# EAGLE board jncc3000 (EAGLE 6.5.0)
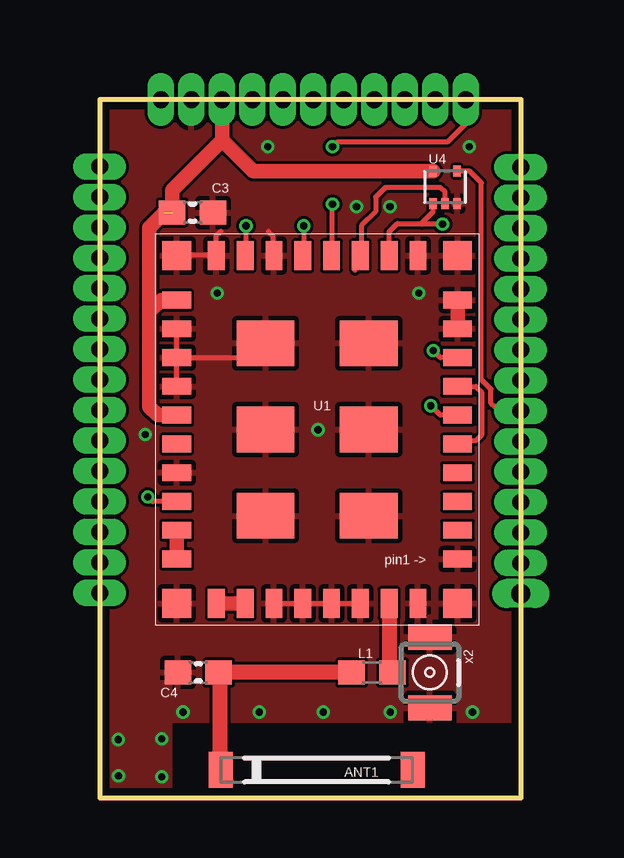
[diagram p0: board, top side]
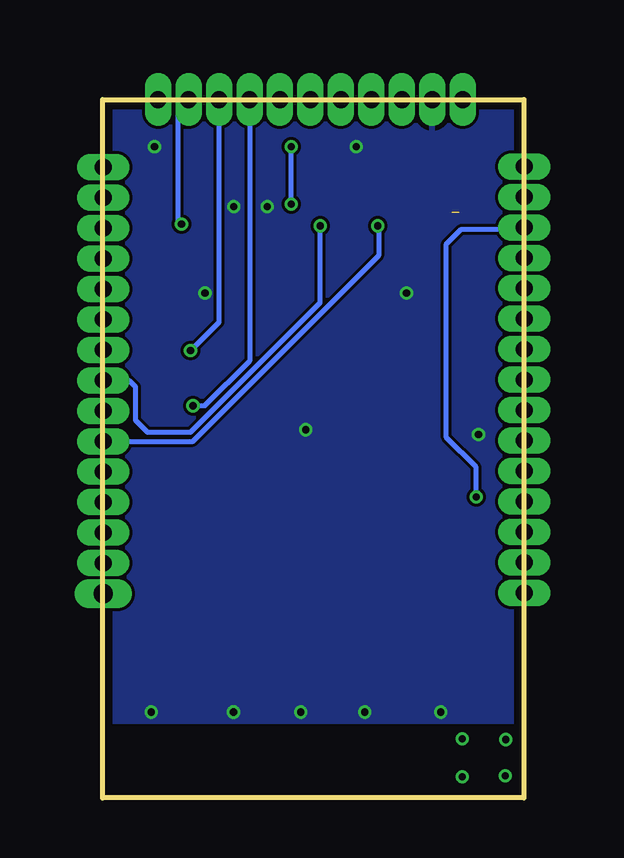
[diagram p1: board, bottom side, seen from below]

Size 17.55 x 29.12 mm. Coordinates in mm from the lower left corner, seen from the top.
Outline: 0,0 17.55,0 17.55,29.12 0,29.12 0,0
Copper layers (1*16): Top 0.035mm / dielectric 1.5mm / Bottom 0.035mm
Design rules "PCB-POOL HighSpec": minimum track width 0.125mm, minimum drill 0.2mm, track to track 0.125mm, track to pad 0.125mm, pad to pad 0.125mm, via to via 0.125mm, smd to smd 0.125mm, copper to edge 0.3mm, drill to drill 0.2mm, minimum pad ring 0.2mm, minimum via ring 0.125mm, stop-mask expansion 0.075mm, vias tented up to drill 0mil, thermal gap 0.2mm
Net classes: 2 RF: width 0.635 mm, clearance 0.762 mm

## Footprints (pad centres in the part's own frame; a part is rotated, then mirrored left to right if it is on the bottom)
AT8010 = smd 1 x 1.5: NC -4,0; SIG 4,0
C0603 = smd 1.1 x 1: 1 -0.85,0; 2 0.85,0
0603 = smd 1.1 x 1: 1 -0.85,0; 2 0.85,0
CC3000 = smd 1.2 x 0.7: EXT_32K 5.85,-2.97; GND@1 -5.85,5.43; GND@9 -5.85,-4.17; GND@10 -5.85,-5.37; GND@20 5.85,-4.17; GND@22 5.85,-1.77; GND@25 5.85,1.83; NC -5.85,3.03; RESERVED_1 -5.85,4.23; RESERVED_2 -5.85,1.83; RESERVED_3 5.85,0.63; SDA_CC3000 5.85,5.43; SDA_EEPROM 5.85,4.23; VBAT_IN 5.85,-5.37; VBAT_SW_EN 5.85,3.03; VIO_HOST 5.85,-0.57; WL_EN1 -5.85,-1.77; WL_EN2 -5.85,0.63; WL_RS232_RX -5.85,-2.97; WL_RS232_TX -5.85,-0.57 | smd 0.7 x 1.2: GND@11 -4.2,-7.22; GND@16 1.8,-7.22; GND@18 4.2,-7.22; GND@31 1.8,7.28; GND@32 0.6,7.28; GND@33 -0.6,7.28; GND@34 -1.8,7.28; GND@36 -4.2,7.28; RF_ANT -3,7.28; SCL_CC3000 3,7.28; SCL_EEPROM 4.2,7.28; SPI_CLK 3,-7.22; SPI_CS -3,-7.22; SPI_DIN 0.6,-7.22; SPI_DOUT -1.8,-7.22; SPI_IRQ -0.6,-7.22 | smd 2.4 x 1.9: GND@37 -2.15,3.63; GND@38 -2.15,0.03; GND@39 -2.15,-3.57; GND@40 2.15,3.63; GND@41 2.15,0.03; GND@42 2.15,-3.57 | smd 1.2 x 1.2: GND@43 -5.85,7.28; GND@44 -5.85,-7.22; GND@45 5.85,-7.22; GND@46 5.85,7.28
SOT-553 = smd 0.3 x 0.45: /OE -0.5,0; GND 0.5,0; IN 0,0; OUT 0.5,1.35; VCC -0.5,1.35
JN5139_TH = drill 0.8 pad 1.016 long: P$1 0,1.27 | drill 0.7 pad 1.016 long: P$2 0,0; P$3 0,-1.27; P$4 0,-2.54; P$5 0,-3.81; P$6 0,-5.08; P$7 0,-6.35; P$8 0,-7.62; P$9 0,-8.89; P$10 0,-10.16; P$11 0,-11.43; P$12 0,-12.7; P$13 0,-13.97; P$14 0,-15.24; P$15 0,-16.51; P$16 2.286,-19.326; P$17 3.556,-19.326; P$18 4.826,-19.326; P$19 6.096,-19.326; P$20 7.366,-19.326; P$21 8.636,-19.326; P$22 9.906,-19.326; P$23 11.176,-19.326; P$24 12.446,-19.326; P$25 13.716,-19.326; P$26 14.986,-19.326; P$27 17.544,-16.536; P$28 17.544,-15.266; P$29 17.544,-13.996; P$30 17.544,-12.726; P$31 17.544,-11.456; P$32 17.544,-10.186; P$33 17.544,-8.916; P$34 17.544,-7.646; P$35 17.544,-6.376; P$36 17.544,-5.106; P$37 17.544,-3.836; P$38 17.544,-2.566; P$39 17.544,-1.296; P$40 17.544,-0.026; P$41 17.544,1.244
IPEX-20279-001E = smd 1 x 1.05: 1 0,1.528 | smd 1.05 x 1.8: 2@1 -1.475,0; 2@2 1.475,0

## Placement (x,y rotation side)
ANT1  AT8010  [AT8010]  9.02,1.17 180 top
C3  100nF  [C0603]  3.86,24.41 0 top
C4  0.8pF  [C0603]  4.1,5.23 180 top
L1  3.3nH  [0603]  11.34,5.23 0 top
U1  [CC3000]  9.05,15.39 180 top
U4  [SOT-553]  14.38,24.78 0 top
U$2  [JN5139_TH]  17.53,9.79 180 top
X2  [IPEX-20279-001E]  13.75,5.23 90 top

## Library data of the parts
ANT1 = Spark; DIGIKEY: www.digikey.de/product-detail/en/2500AT44M0400E/712-1403-1-ND/1840081
C3 = rcl; DIGIKEY: www.digikey.de/product-detail/en/CC0603KRX7R8BB104/311-1341-1-ND/2103125
C4 = rcl; COMMENT: RF Capacitor; DIGIKEY: www.digikey.de/product-detail/en/251R14S0R8BV4T/712-1305-1-ND/1786767
L1 = SparkFun-Passives; COMMENT: RF Inductor; DIGIKEY: www.digikey.de/product-detail/en/L-14C3N3SV4T/712-1428-1-ND/1914878
U1 = jncc3000.lbrjncc3000; DIGIKEY: www.digikey.de/product-detail/en/CC3000MODR/296-35512-1-ND/3768439
U4 = jncc3000.lbrjncc3000; DIGIKEY: www.digikey.de/product-detail/en/NL17SZ125XV5T2G/NL17SZ125XV5T2GOSCT-ND/3462428
U$2 = jncc3000.lbrjncc3000; PLACE: no
X2 = Spark; PLACE: no

## Nets
+3V3: C3.1 U1.VBAT_IN U1.VIO_HOST U4.VCC U$2.P$24
GND [vcc]: C3.2 C4.2 U1.EXT_32K U1.GND@1 U1.GND@9 U1.GND@10 U1.GND@11 U1.GND@16 U1.GND@18 U1.GND@20 U1.GND@22 U1.GND@25 U1.GND@31 U1.GND@32 U1.GND@33 U1.GND@34 U1.GND@36 U1.GND@37 U1.GND@38 U1.GND@39 U1.GND@40 U1.GND@41 U1.GND@42 U1.GND@43 U1.GND@44 U1.GND@45 U1.GND@46 U4.GND U$2.P$25 X2.2@1 X2.2@2
N$2 [RF]: L1.2 U1.RF_ANT X2.1
N$3 [RF]: ANT1.SIG C4.1 L1.1
N$7: U1.SCL_CC3000 U1.SCL_EEPROM
N$9: U1.WL_EN1 U1.WL_EN2
N$15: U1.SDA_CC3000 U1.SDA_EEPROM
SPI_DOUT: U1.SPI_DOUT U4.IN
SPI_MISO: U4.OUT U$2.P$7
SPI_MOSI: U1.SPI_DIN U$2.P$8
SPI_SCK: U1.SPI_CLK U$2.P$6
WIFI_CS: U1.SPI_CS U4./OE U$2.P$17
WIFI_EN: U1.VBAT_SW_EN U$2.P$29
WIFI_INT: U1.SPI_IRQ U$2.P$16
WL_RS232_RX: U1.WL_RS232_RX U$2.P$18
WL_RS232_TX: U1.WL_RS232_TX U$2.P$19

## Tracks (layer width: path | path; a pad name or v marks a point on that pad's centre or on a via)
+3V3  (1 unrouted)
  Top 0.61: U1.VIO_HOST 2.41,15.96 2.06,16.3 2.06,20.27 | 2.06,20.27 2.56,20.76 U1.VBAT_IN | U$2.P$24 5.09,27.43 | 5.09,27.43 3.01,25.35 C3.1 | 2.69,24.41 2.06,23.79 2.06,20.27 | 5.09,27.43 6.39,26.13 U4.VCC
GND  (via drill 0.3)
  Top 0.203: U1.GND@43 14.9,8.27 | U1.GND@31 U1.GND@32 U1.GND@33 U1.GND@34 | U1.GND@22 U1.EXT_32K | U1.GND@38 11.3,15.26 | U1.GND@25 3.38,13.74 | U1.EXT_32K U1.GND@20 | U1.EXT_32K 6.3,18.36 U1.GND@42 | 3.16,8.15 U1.GND@46 | U1.GND@18 4.83,22.63 | 7.15,22.12 7.15,22.5 U1.GND@16 7.2,22.66 7.2,23.44 7.02,23.62 | 5.04,23.62 4.83,23.42 4.83,22.63 | 4.83,22.63 3.22,22.63 U1.GND@45
  Top 0.61: U1.GND@10 U1.GND@9
  other vias: 2.57,0.89 9.3,3.58 12.1,3.58 15.53,3.58 6.64,3.58 3.46,3.58 2.57,2.46 0.76,2.44 0.78,0.92 1.89,15.15 9.09,15.35 13.29,21.05 4.89,21.05 12.09,24.65 10.69,24.65 15.39,27.15 6.99,27.15
  pour Bottom: -0.11,29.21 17.71,29.21 17.65,3.2 0.02,3.2
  pour Top (no thermals): -0.11,4.85 -0.11,2.69 -0.07,0.15 2.95,0.15 2.95,4.85
  pour Top: -0.11,29.21 17.71,29.21 17.71,3.2 -0.11,3.2
N$2
  Top 0.203: L1.2 X2.1
  Top 0.635: U1.RF_ANT 12.05,5.37 L1.2
N$3
  Top 0.635: ANT1.SIG | 4.99,5.23 4.99,1.2 ANT1.SIG | L1.1 4.99,5.23 | 4.99,5.23 C4.1
N$7
  Top 0.61: U1.SCL_CC3000 U1.SCL_EEPROM
N$9
  Top 0.203: U1.WL_EN1 15.66,17.16 15.91,16.91 15.91,15.14 15.65,14.88 15.02,14.88 U1.WL_EN2
N$15
  Top 0.61: U1.SDA_EEPROM U1.SDA_CC3000
SPI_DOUT
  Top 0.203: 10.62,21.99 10.62,22.38 U1.SPI_DOUT 10.89,22.65 10.89,23.85 11.49,24.45 11.49,25.05 11.89,25.45 14.19,25.45 14.38,25.26 U4.IN
SPI_MISO
  Top 0.203: U$2.P$7 16.62,16.15 16.29,16.45 16.29,17.05 15.89,17.45 15.89,25.65 15.41,26.13 U4.OUT
SPI_MOSI  (via drill 0.3)
  Top 0.203: 8.49,22.55 8.45,22.21 U1.SPI_DIN 8.49,22.65 v8.49,23.85
  Bottom 0.203: U$2.P$8 16.45,17.41 16.19,17.15 16.19,15.75 15.69,15.25 13.89,15.25 8.49,20.65 v8.49,23.85
SPI_SCK  (via drill 0.3)
  Top 0.203: U1.SPI_CLK 6.09,22.65 v6.09,23.85
  Bottom 0.203: U$2.P$6 13.79,14.87 U1.SPI_CLK 6.05,23.81 v6.09,23.85
WIFI_CS  (via drill 0.3)
  Top 0.203: U1.SPI_CS 12.05,23.61 12.39,23.95 13.39,23.95 | 13.39,23.95 13.88,24.44 U4./OE | v14.27,23.92 13.42,23.92 13.39,23.95
  Bottom 0.203: U$2.P$17 14.42,28.67 14.42,24.07 v14.27,23.92
WIFI_EN  (via drill 0.3)
  Top 0.203: 3.22,12.34 U1.VBAT_SW_EN 2.18,12.36 v1.99,12.55
  Bottom 0.203: v1.99,12.55 1.99,13.79 3.23,15.03 3.23,23.09 2.61,23.71 0.06,23.71 U$2.P$29
WIFI_INT  (via drill 0.3)
  Top 0.203: U1.SPI_IRQ 9.69,22.65 v9.69,24.75 | U$2.P$16 15.24,28.1 14.49,27.35 9.89,27.35 v9.69,27.15
  Bottom 0.203: v9.69,24.75 v9.69,27.15
WL_RS232_RX  (via drill 0.3)
  Top 0.203: U1.WL_RS232_RX 14.18,18.36 v13.89,18.65
  Bottom 0.203: v13.89,18.65 12.7,19.84 U$2.P$18
WL_RS232_TX  (via drill 0.3)
  Top 0.203: U1.WL_RS232_TX 14.18,15.96 v13.79,16.35
  Bottom 0.203: U$2.P$19 11.43,18.21 13.29,16.35 v13.79,16.35

## Text on the board
tNames: U4 | U1 | pin1 -> | x2